# Altium PCB 小智-V1.1.PCBDOC
Units mil, origin at the board's own origin, x right, y up, seen from the top; angles counter-clockwise.
Board outline 1964.55 x 1299.13 mil, 2 copper layers (Top Layer, Bottom Layer); 107 components, 65 nets, 340 pads, 228 vias.
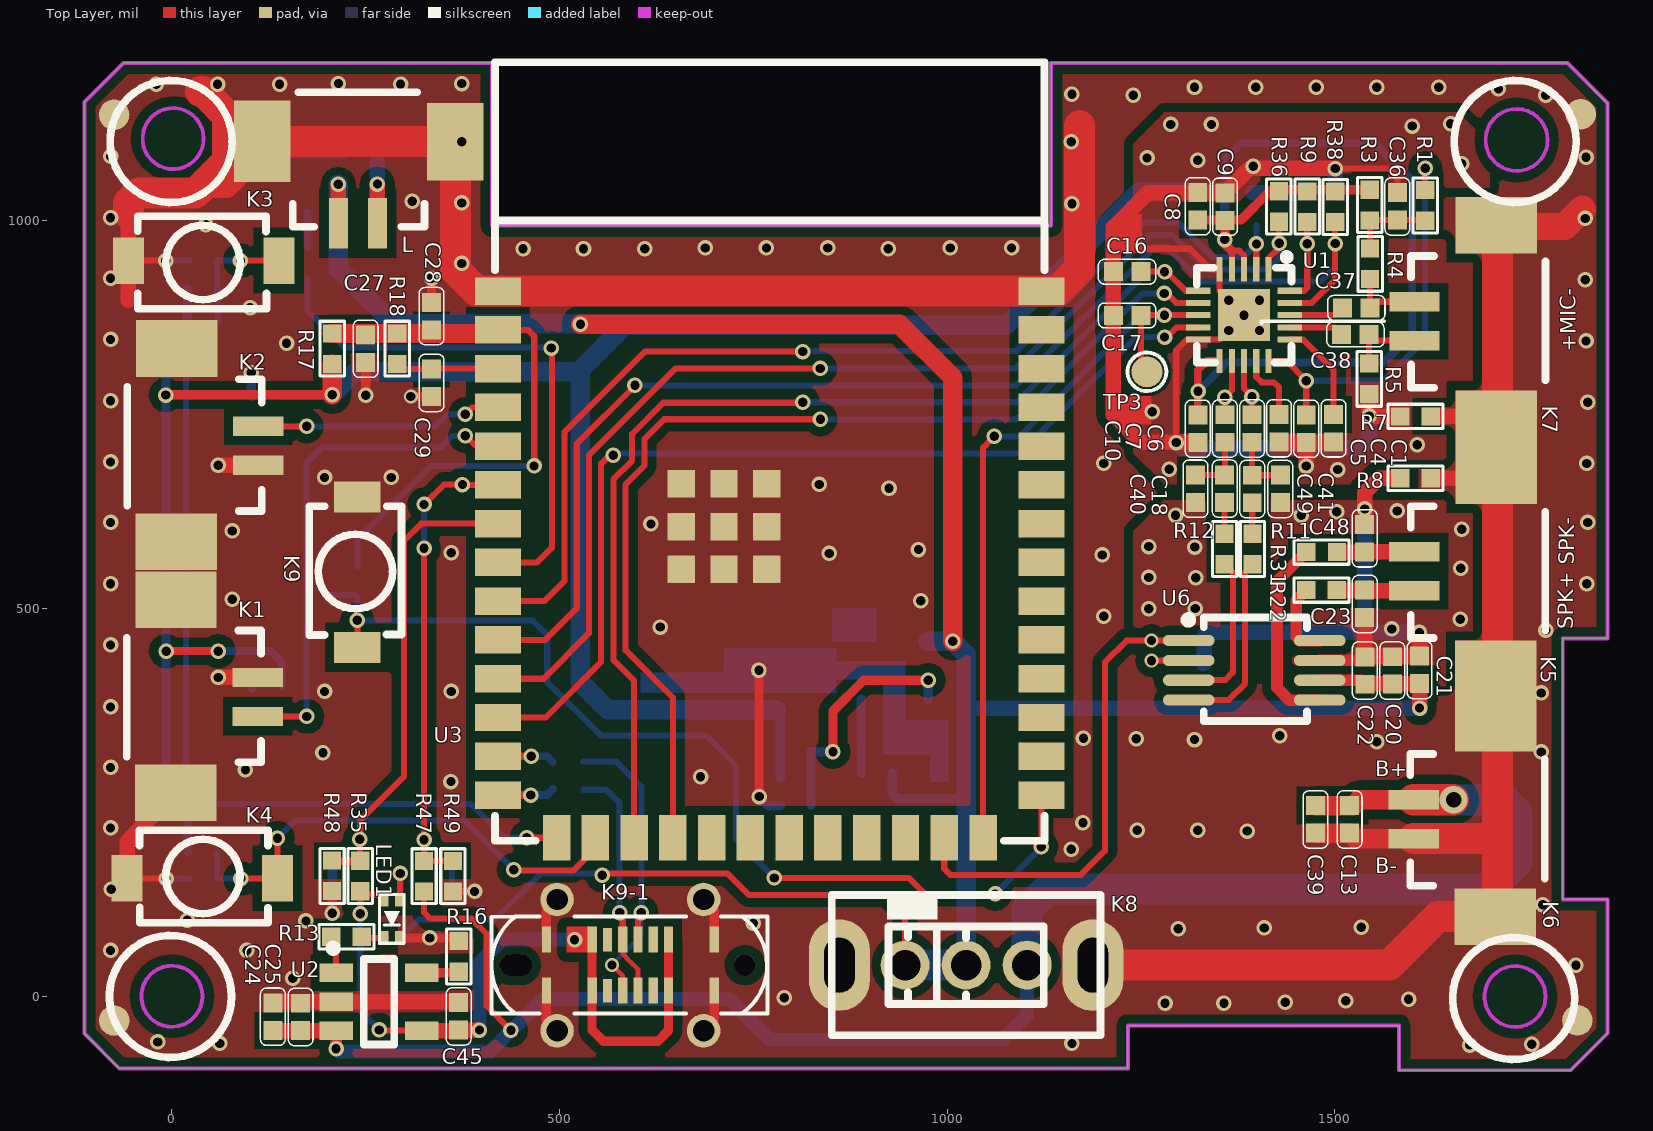
[diagram p0: Top Layer view]
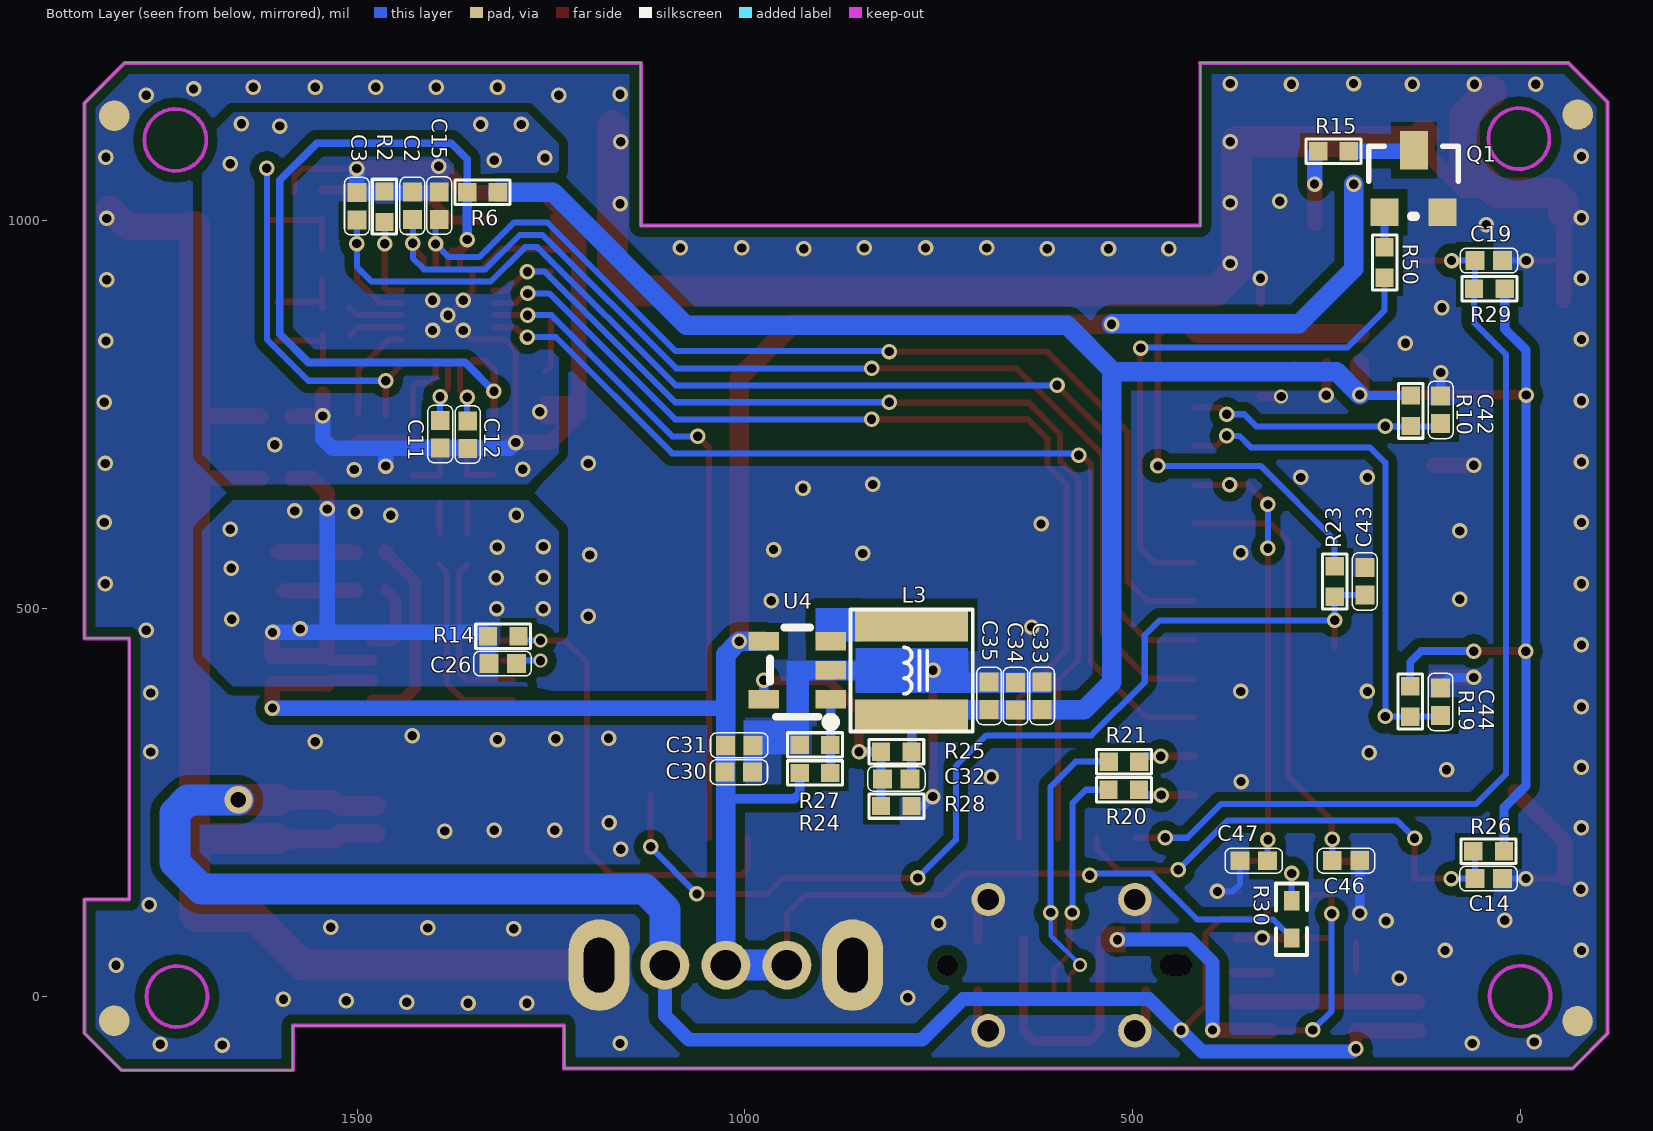
[diagram p1: Bottom Layer view, seen from below]

## Layer stack, top to bottom
Top Layer: signal copper 1.4
Dielectric: dielectric 12.6, FR-4, Dk 4.8
Bottom Layer: signal copper 1.4

## Board outline
-67.69,-93.28 -112.73,-48.24 -112.73,1153.01 -62.11,1203.63 412.65,1203.63 412.65,993.77 1134.03,993.77 1134.03,1203.63 1799.88,1203.63 1851.82,1151.68 1851.82,461.4 1793.9,461.4 1793.9,124.74 1851.81,124.74 1851.81,-47.75 1804.05,-95.51 1582.9,-95.51 1582.9,-37.9 1233.04,-37.9 1233.04,-93.28

## Design rules (kind name [scope] priority, off if disabled: settings)
Clearance Clearance_1 [InPolygon] p1: gap=12
Clearance [All] p2: gap=7.87
ComponentClearance [All] p1: gap=0 collisioncheckmode=3 verticalgap=0 showdistances=FALSE
HoleToHoleClearance [All] p1: gap=0 allowstackedmicrovias=TRUE
MinimumSolderMaskSliver [All] p1: minsoldermaskwidth=0
PlaneConnect [All] p1: planeconnectstyle=Direct reliefexpansion=20 reliefentries=4 reliefconductorwidth=10 reliefairgap=10
PolygonConnect [All] p1: connectstyle=Direct reliefconductorwidth=10 reliefentries=4 polygonreliefangle="90 Angle"
RoutingVias [All] p1: holewidth=12 width=20 viastyle="Through Hole" minholewidth=12 minwidth=18 maxholewidth=20 maxwidth=36
SilkToSilkClearance [All] p1: silktosilkclearance=0
SilkscreenOverComponentPads [All] p1: minsilkscreentomaskgap=0
SolderMaskExpansion [All] p1: expansion=4
Width [All] p1: maxlimit=100 minlimit=6 preferedwidth=7.87 minimp=50.000000 maximp=50.000000 favimp=50.000000
22 further rules are at their usual default settings.

## Classes and differential pairs
component class "Audio Codec": C1 C2 C3 C4 C5 C6 C7 C8 C9 C10 C11 C12 C15 C16 C17 C18 C20 C21 C22 C23 C26 C36 C37 C38 C40 C41 C48 C49 C? K5 K7 R1 R2 R3 R4 R5 R6 R7 R8 R9 R11 R12 R14 R22 R31 R36 R38 R? TP3 U1 U6
component class ESP32-S3: C13 C14 C19 C24 C25 C27 C28 C29 C30 C31 C32 C33 C34 C35 C39 C40 C41 C43 C45 C46 C47 D1 D2 FB1 FB2 K1 K2 K3 K4 K6 K8 K9 K9-1 K10 L L1 L2 L3 LED1 P1 P4 P5 P6 Q1 R10 R13 R15 R16 R17 R18 R19 R20 R21 R23 R24 R25 R26 R27 R28 R29 R30 R35 R47 R48 R49 R50 TP4 TP5 U2 U3 U4 U5 U7 U8

## Components (designator, comment, footprint, x,y, rotation, side; value= is the part's Value field where it differs from the comment)
C1 "1uF/16V" C0402 1498.28,732.34 r270 top
C2 "22pF/50V" C0402 1428.81,1019.34 r270 bottom
C3 "22pF/50V" C0402 1500.35,1018.86 r270 bottom
C4 "1uF/16V" C0402 1463.16,731.79 r270 top
C5 "1uF/16V" C0402 1428.04,732.34 r270 top
C6 "1uF/16V" C0402 1393.3,732.09 r90 top
C7 "1uF/16V" C0402 1358.13,732.09 r90 top
C8 "100nF/50V" C0402 1323.17,1018.73 r270 top
C9 "100nF/50V" C0402 1358.35,1018.19 r270 top
C10 "1uF/16V" C0402 1323.24,731.81 r90 top
C11 "22pF/50V" C0402 1392.81,724.95 r90 bottom
C12 "22pF/50V" C0402 1357.4,724.27 r90 bottom
C13 "22uF/6.3V" C0402 1519,228 r90 top
C14 "100nF/50V" C0402 40.84,151.7 r180 bottom
C15 "22pF/50V(NC)" C0402 1394.13,1019.62 r270 bottom
C16 "22pF/50V(NC)" C0402 1232.01,934.38 r0 top
C17 "22pF/50V(NC)" C0402 1232.1,877.91 r0 top
C18 "100nF/50V" C0402 1357.89,654.54 r90 top
C19 "100nF/50V" C0402 40.46,948.73 r180 bottom
C20 "22uF/16V" C0402 1574.1,420.07 r270 top
C21 "22uF/16V" C0402 1609.21,420.79 r270 top
C22 "1uF/16V" C0402 1538.64,419.96 r270 top
C23 "1nF/50V" C0402 1538.46,505.91 r270 top
C24 "10uF/16V" C0402 130.36,-26.47 r270 top
C25 "100nF/50V" C0402 166.16,-26.83 r270 top
C26 "1uF/16V" C0402 1312.46,428.99 r0 bottom
C27 "22uF/6.3V" C0402 250,835 r90 top
C28 "100nF/16V" C0402 335,877 r270 top
C29 "1uF/16V" C0402 335,791 r90 top
C30 "10uF/16V" C0402 1007.76,288.9 r0 bottom
C31 "100nF/50V" C0402 1007.3,323.45 r0 bottom
C32 "22pF/50V" C0402 804.6,280.22 r180 bottom
C33 "100nF/50V" C0402 616.62,387.32 r270 bottom
C34 "10uF/16V" C0402 650.9,386.93 r270 bottom
C35 "10uF/16V" C0402 685.05,387.33 r270 bottom
C36 "1uF/16V" C0402 1580.62,1018.52 r90 top
C37 "1uF/16V" C0402 1527.68,887.71 r0 top
C38 "1uF/16V" C0402 1526.46,853.28 r0 top
C39 "100nF/50V" C0402 1475,228 r90 top
C40 "22pF/50V" C0402 1320.26,654.46 r90 top
C41 "22pF/50V" C0402 1429.73,654.27 r90 top
C42 "100nF/50V" C0402 102.6,756.15 r90 bottom
C43 "100nF/50V" C0402 200.44,534.93 r90 bottom
C44 "100nF/50V" C0402 102.79,379.57 r90 bottom
C45 "1uF/16V" C0402 369.97,-26.06 r90 top
C46 "100nF/50V" C0402 224.7,174.71 r180 bottom
C47 "100nF/50V" C0402 343.67,174.67 r0 bottom
C48 "1nF/50V" C0402 1538.41,590.47 r90 top
C49 "100nF/50V" C0402 1393.44,654.1 r90 top
K1 "Touch1" HC-1.25-2PWT#1 110.78,360.74 r90 top locked
K2 "Touch2" HC-1.25-2PWT#1 111.5,684.56 r90 top locked
K3 "SW-PB" K(3*4*2.5H) -55.86,948.73 r0 top locked
K4 "SW-PB" K(3*4*2.5H) 136.3,151.88 r180 top locked
K5 "SPK" HC-1.25-2PWT#1 1602.39,572.99 r270 top locked
K6 "BAT" HC-1.25-2PWT#1 1601.76,253.32 r270 top locked
K7 "MIC" HC-1.25-2PWT#1 1602.7,895.64 r270 top locked
K8 "Header 3X2" "SS12D07VG4 087" 1024.46,40.01 r0 top locked
K9 "SW-PB" K(3*4*2.5H) 239.33,643.84 r270 top
K9-1 "GT-USB-7055E" GT-USB-7055E 591.43,40.01 r180 top locked
L "" HC-1.25-2PWT#2 215,996.79 r0 top locked
L3 "2.2uH/3A" SWPA4020 784.81,419.96 r270 bottom
LED1 "RG_LED(D0603)" LED-SMD_4P-L1.6 283.76,99.72 r90 top
Q1 "MMBTA06" SOT-23 137.65,1051.02 r180 bottom
R1 "220R/(1%)" R0402#1 1616.51,1019.92 r270 top
R2 "10K/(1%)" R0402#1 1464.79,1018.11 r90 bottom
R3 "220R/(1%)" R0402#1 1545.2,1020.15 r270 top
R4 "2K/(1%)" R0402#1 1545.45,944.56 r270 top
R5 "2K/(1%)" R0402#1 1544.32,796.21 r270 top
R6 "0R/(1%)" R0402#1 1338.26,1036.98 r180 bottom
R7 "0R/(1%)" R0402#1 1603.85,747.66 r0 top
R8 "0R/(1%)" R0402#1 1603.91,667.8 r0 top
R9 "10K/(1%)" R0402#1 1464.22,1018.18 r90 top
R10 "1K/(1%)" R0402#1 141,755 r270 bottom
R11 "100K/(1%)" R0402#1 1393.72,576.6 r90 top
R12 "100K/(1%)" R0402#1 1357.77,576.6 r90 top
R13 "330R/(1%)" R0402#1 225.47,76.57 r180 top
R14 "10K/(1%)" R0402#1 1311.63,464.32 r0 bottom
R15 "330R/(1%)" R0402#1 240.86,1089.73 r0 bottom
R16 "2.4K 1%" R0402#1 369.97,51.36 r270 top
R17 "0R/(1%)" R0402#1 207,835 r90 top
R18 "1K/(1%)" R0402#1 291,835 r270 top
R19 "1K/(1%)" R0402#1 142,380 r270 bottom
R20 "22R(1%)" R0402#1 511.26,266.17 r0 bottom
R21 "22R(1%)" R0402#1 510.97,302.52 r0 bottom
R22 "0R/(1%)" R0402#1 1482.62,523.77 r0 top
R23 "47K/(1%)" R0402#1 239.33,534.67 r270 bottom
R24 "100K/(1%)" R0402#1 909.58,287.89 r180 bottom
R25 "680K/(1%)" R0402#1 804.68,315.39 r0 bottom
R26 "47K/(1%)" R0402#1 40.72,186.79 r0 bottom
R27 "100K/(1%)" R0402#1 909.34,324 r0 bottom
R28 "150K/(1%)" R0402#1 804.65,245.19 r180 bottom
R29 "47K/(1%)" R0402#1 39.84,912.29 r0 bottom
R30 "1K(1%)" R0402#2 294.82,99.13 r270 bottom
R31 "0R/(1%)" R0402#1 1482.99,572.77 r0 top
R35 "100K" R0402#1 242.89,154.83 r270 top
R36 "100K/(1%)" R0402#1 1427.88,1018.47 r270 top
R38 "100K/(1%)" R0402#1 1500.38,1018.03 r270 top
R47 "301K" R0402#1 325.32,154.71 r270 top
R48 "100K" R0402#1 206.68,155.21 r90 top
R49 "100K" R0402#1 362.66,154.71 r90 top
R50 "1K/(1%)" R0402#1 174.94,946.02 r90 bottom
TP3 "TP" TEST_SMD 1257.66,805.23 r0 top
U1 "ES8311" WQFN-20-EP(3x3)_ES8311 1414.41,937.31 r180 top
U2 "TP4054" SOT-23-5 267.14,-7.09 r180 top
U3 "ESP32-S3-WROOM-1" ESP32-S3-WROOM-1 771.27,556.86 r0 top locked
U4 "ETA3409S2F" SOT23-5_ETA3409S2F 889.1,383.03 r90 bottom
U6 "NS4150B" MSOP-8_L3.0-W3.0 1396.1,420.23 r270 top locked

## Footprints (in the part's own frame and the unit in brackets; to place one, negate y for a bottom-side part, rotate by r counter-clockwise, add the part's x,y. Pads: shape width x height; smd on the part's side, far side on the other; paste and mask are expansions set on the pad)
C0402 [mm]
  rect 0.62x0.62 smd: 1(-0.45,0) 2(0.45,0)
  silkscreen extent -0.94,-0.41 0.94,0.41
ESP32-S3-WROOM-1 [mm]
  rect 1.5x0.9 smd: 1(-8.9,8.955) 2(-8.9,7.685) 3(-8.9,6.415) 4(-8.9,5.145) 5(-8.9,3.875) 6(-8.9,2.605) 7(-8.9,1.335) 8(-8.9,0.065) 9(-8.9,-1.205) 10(-8.9,-2.475) 11(-8.9,-3.745) 12(-8.9,-5.015) 13(-8.9,-6.285) 14(-8.9,-7.555) 27(8.9,-7.555) 28(8.9,-6.285) 29(8.9,-5.015) 30(8.9,-3.745) 31(8.9,-2.475) 32(8.9,-1.205) 33(8.9,0.065) 34(8.9,1.335) 35(8.9,2.605) 36(8.9,3.875) 37(8.9,5.145) 38(8.9,6.415) 39(8.9,7.685) 40(8.9,8.955)
  rect 0.9x1.5 smd: 15(-6.985,-8.954) 16(-5.715,-8.954) 17(-4.445,-8.954) 18(-3.175,-8.954) 19(-1.905,-8.954) 20(-0.635,-8.954) 21(0.635,-8.954) 22(1.905,-8.954) 23(3.175,-8.954) 24(4.445,-8.954) 25(5.715,-8.954) 26(6.985,-8.954)
  rect 0.9x0.9 smd: 41(-2.9,-0.165) 41(-2.9,1.235) 41(-2.9,2.635) 41(-1.5,-0.165) 41(-1.5,1.235) 41(-1.5,2.635) 41(-0.1,-0.165) 41(-0.1,1.235) 41(-0.1,2.635)
  silkscreen extent -9,-9.05 9,16.45
GT-USB-7055E [mm]
  round 1.1 hole 0.7: 0(-2.4,2.15) 0(-2.4,-2.15) 0(2.4,2.15) 0(2.4,-2.15)
  rect 0.3x0.85 smd: A1(-2.75,0.835) A4(-1.25,0.835) A5(-0.75,0.835) A6(-0.25,0.835) A7(0.25,0.835) A9(1.25,0.835) A12(2.75,0.835) B1(2.75,-0.835) B4(1.25,-0.835) B6(0.25,-0.835) B7(-0.25,-0.835) B8(-0.75,-0.835) B9(-1.25,-0.835) B12(-2.75,-0.835)
  rect 0.3x0.762 smd: A8(0.75,0.835) B5(0.75,-0.835)
  round 0.7 hole 0.7: NC(-3.75,0)
  oval 1.05x0.7 hole 0.7 slot 1.05 at 0 deg: NC(3.75,0)
  silkscreen extent -4.5,-1.59 4.55,1.59
HC-1.25-2PWT#1 [mil]
  rect 25x65 smd: 1(0,0) 2(50.28,0)
  rect 73x105 smd: 3(150.7,105.28) 4(-98.48,105.7)
  silkscreen extent -59,-4 111,169
HC-1.25-2PWT#2 [mil]
  rect 25x65 smd: 1(0,0) 2(50.28,0)
  rect 73x100 smd: 3(150.7,105.28)
  rect 73x105 smd: 4(-98.47,105.7)
  silkscreen extent -59,-4 111,169
K(3*4*2.5H) [mil]
  rect 40x60 smd: 1(0,0) 2(193.89,0)
  round 65 on Top Overlay: 3(95.84,-3.33)
  silkscreen extent 12,-62 178,57
LED-SMD_4P-L1.6 [mm]
  rect 0.45x0.35 smd: 1(-0.625,0.275) 3(0.625,0.275) 4(0.625,-0.275)
  rect 0.45x0.33 smd: 2(-0.625,-0.275)
  silkscreen extent -0.8,-0.4 0.8,0.4
MSOP-8_L3.0-W3.0 [mm]
  oval 0.364x1.692 smd: 1(-0.975,-2.146) 2(-0.325,-2.146) 3(0.325,-2.146) 4(0.975,-2.146) 5(0.975,2.146) 6(0.325,2.146) 7(-0.325,2.146) 8(-0.975,2.146)
  silkscreen extent -1.78,-2.29 1.66,1.73
R0402#1 [mm]
  rect 0.6x0.6 smd: 1(-0.5,0) 2(0.5,0)
  silkscreen extent -0.9,-0.4 0.9,0.4, body extent -0.55,-0.3 0.55,0.3, height 2.54
R0402#2 [mm]
  rect 0.635x0.508 smd: 1(-0.612,0) 2(0.612,0)
  silkscreen extent -1.17,-0.51 1.17,0.51, body extent -0.49,-0.25 0.51,0.25, height 0.35
SOT23-5_ETA3409S2F [mm]
  rect 0.6x1 smd: 1(0,0) 2(0.95,0) 3(1.9,0) 4(1.9,2.2) 5(0,2.2)
  silkscreen extent -0.9,-0.15 2.35,1.99
SOT-23 [mil]
  rect 36x36 smd: 1(-37.5,-40) 2(37.5,-40)
  rect 36x50 smd: 3(0.5,40)
  silkscreen extent -58,-45 58,45
SOT-23-5 [mm]
  rect 1.1x0.6 smd: 1(1.4,-0.95) 2(1.4,0) 3(1.4,0.95) 4(-1.4,0.95) 5(-1.4,-0.95)
  silkscreen extent -0.5,-1.87 1.62,1.4
"SS12D07VG4 087" [mm]
  round 1.6 hole 1: 1(-2,0) 2(0,0) 3(2,0)
  oval 2x3 hole 1 slot 1.8 at 90 deg: 4(4.15,0) 5(-4.15,0)
  silkscreen extent -4.4,-2.3 4.4,2.3
SWPA4020 [mm] "15uH1.5A  SWPA4020"
  rect 1.1x3.7 smd: 1(-1.5,0) 2(1.5,0)
  silkscreen extent -2,-2 2,2
TEST_SMD [mil]
  round 40 smd mask+1.65: 1(0,0)
  silkscreen extent -25,-25 25,25
WQFN-20-EP(3x3)_ES8311 [mm]
  rect 0.2x0.8 smd: 1(0,0) 2(0.4,0) 3(0.8,0) 4(1.2,0) 5(1.6,0) 11(1.6,3) 12(1.2,3) 13(0.8,3) 14(0.4,3) 15(0,3)
  rect 0.8x0.2 smd: 6(2.3,0.7) 7(2.3,1.1) 8(2.3,1.5) 9(2.3,1.9) 10(2.3,2.3) 16(-0.7,2.3) 17(-0.7,1.9) 18(-0.7,1.5) 19(-0.7,1.1) 20(-0.7,0.7)
  rect 1.7x1.7 smd: 21(0.8,1.5)
  silkscreen extent -0.75,-0.5 2.35,3.05

## Part data
C1 C2 C3 C4 C5 C6 C7 C8 C9 C10 C11 C12 C14 C15 C16 C17 C18 C19 C20 C21 C22 C23 C26 C27 C28 C29 C30 C31 C32 C33 C34 C35 C36 C37 C38 C40 C41 C42 C43 C44 C48 C49: library part Cap, "Capacitor"
C13 C24: library part "0603 10uF (106) 10% 10V", "贴片电容"
C25 C39: library part "0402 100nF (104) 10% 16V", "贴片电容"
C45: library part "0603 470nF (474) 10% 25V", "贴片电容"
C46 C47: library part "0603 1.0pF (010) 0.25pF 50V", "贴片电容"
K1 K2 K5 K6 K7 L: library part "Header 2X2", "Header, 2-Pin, Dual row"
K8: "Header, 3-Pin, Dual row"
L3: library part Inductor, "Inductor"
LED1: library part RG_LED
Q1: library part 2N3904, "NPN General Purpose Amplifier"
R1 R2 R3 R4 R5 R6 R7 R8 R9 R10 R11 R12 R14 R15 R17 R18 R19 R20 R21 R22 R23 R24 R25 R26 R27 R28 R29 R31 R36 R38 R50: library part Res1, "Resistor"
R13 R30: library part "0402 1KΩ (1001) 1%", "贴片电阻"
R16: library part "0402 2.4KΩ (2401) 1%", "贴片电阻"
R35 R47 R48 R49: library part "0402 100KΩ (1003) 1%", "贴片电阻"
U2: "电池电源管理"
U6: library part NS4150

## Free pads (board coordinates)
  round 39.37 smd: 0(-74.39,1136.64) 0(-74.14,-31.39) 0(1812.9,-31.18) 0(1816.99,1137.5)
  round 39.37 smd far side: 0(-74.07,1137.01) 0(-73.92,-32.14) 0(1813.2,-31.69) 0(1813.2,1135.34)

## Via types
v1: diameter 20, hole 12, Top Layer to Bottom Layer, 223 vias
v2: diameter 18, hole 12, Top Layer to Bottom Layer, 4 vias
v3: diameter 36, hole 20, Top Layer to Bottom Layer, 1 vias

## Nets (pads, with @x,y where several pads share a name; then routed paths per layer and width w, separated by ;. In a path a pad name is that pad's centre, name@x,y a point inside that pad or via, vN(x,y) a via of type N, cw(c..) or ccw(c..) an arc to the next point about the centre after c; other vN are vias at no path point)
ADCVREF: C4.1 R1.1 U1.15 | length 527.6
  Top Layer w7.87: U1.15 1437.7,819.19 v1(1463.16,793.73) C4.1 ; R1.1 v1(1616.51,1067.69)
  Bottom Layer w7.87: v1(1463.16,793.73) 1563.01,793.73 1616.51,847.23 v1(1616.51,1067.69)
AU_3V3: C8.2 C9.2 C10.2 R3.1 R6.1 R9.2 R36.1 R38.1 U1.3 U1.4 U1.11 | length 1309.2
  Top Layer w7.87: U1.4 1367.17,961.34 1376.8,961.34 1382.91,955.23 U1.3
  Top Layer w10: C10.2 1323.24,807.02 1335.41,819.19 U1.11@1350.32,819.19
  Top Layer w12: C8.2 1378.91,1001.01 1416.05,1038.15 R36.1 1429.56,1039.83 R3.1 ; C9.2 1358.35,970.16 1367.17,961.34
  Bottom Layer w10: v1(1323.6,780.04) 1360.77,817.21 1562.72,817.21 1599.7,854.19 1599.7,1052.15 1551.81,1100.04 1378.56,1100.04 1357.94,1079.42 R6.1
  Bottom Layer w12: v1(1358.12,975.74) R6.1@1358.12,1036.81
AU_GND: C1.2 C2.1 C3.1 C4.2 C5.2 C8.1 C9.1 C10.1 C11.1 C12.1 C15.1 C16.1 C17.1 C36.2 R2.2 R5.2 R7.1 U1.5 U1.10 U1.21 | length 1845.7
  Top Layer w7.87: 1214.39,963.88 1313.19,963.88 1339.76,937.31 U1.5 1351.42,909.75 U1.21 1351.42,846.75 U1.10 1309.29,846.75 1295.49,832.95 v1@1295.49,714.09 ; v1(1500.35,1067.4) 1570.83,1067.4 1580.62,1057.61 C36.2
  Top Layer w20: C10.1 1295.49,714.09 1250.31,714.09 1214.39,750.01 C17.1 1214.39,963.88 1214.39,991.39 1259.41,1036.41 C9.1@1358.35,1036.41 ; C9.1 1390.28,1067.84 1499.91,1067.84 v1(1500.35,1067.4) ; C5.2 C1.2 ; v1(1463.16,683.69) C4.2 ; v1(1544.32,748.29) R5.2 ; v1@1544.95,747.66 R7.1
  Bottom Layer w20: v1(1295.49,714) 1302.94,706.55 C12.1 C11.1@1392.13,706.55 ; C11.1 C11.1@1392.13,706.55 ; C15.1@1394.13,1036.32 C3.1@1500.09,1036.32 ; v1(1463.16,683.69) 1463.16,703.24 ; C3.1 v1(1500.35,1067.4) ; v1(1544.32,748.29) 1544.32,719 1531.87,706.55 C11.1@1392.13,706.55
  other v1: 1503.71,679.13 1286.47,679.68 1606.1,711.15 1264.68,753.88 1363.17,858.56 1402.71,858.56 1382.94,878.33 1363.02,897.65 1402.71,897.65 1394.83,1070.36 1663.68,1073.73 1323.36,1078.26 1257.78,1081.03 1599.87,1122.18 1288.26,1124.21 1340.9,1124.21 1649.28,1125.06
BAT_MEAS_ADC: C47.1 R47.1 R49.2 U3.6 | length 630.6
  Top Layer w7.87: v1@325.23,577.52 325.32,451.17 ; 325.32,452.14 325.32,451.17 ; v1(325.39,634.15) 351.12,659.88 v1(374.88,659.88) 375.99,659.4 U3.6 ; R49.2 R47.1 v1(325.32,201.62) 325.32,451.17
  Bottom Layer w7.87: v1(325.39,577.52) v1(325.39,634.15) ; C47.1 v1@325.95,200.93
CODEC_I2S0_ASDOUT: U1.7 U3.18 | length 1382.6
  Top Layer w7.87: U3.18 646.27,385.19 585.28,446.18 585.28,660.04 609.44,684.2 609.44,718.51 635.04,744.11 v1(836.58,744.11) ; v1(1280.16,906.33) 1282.96,906.33 1295.29,894 U1.7
  Bottom Layer w7.87: v1(836.58,744.11) 840.15,747.68 844.02,743.81 1089.76,743.81 1116.95,770.99 ; 1093.86,747.91 1116.95,770.99 ; v1(1280.16,906.33) 1252.28,906.33 1116.95,770.99
CODEC_I2S0_DSDIN: U1.9 U3.12 | length 1287.7
  Top Layer w7.87: U3.12 482.05,359.4 553.78,431.13 553.78,686.61 v1@562.21,695.04 ; v1@567.1,699.93 v1(569.3,697.73) ; v1@1280.38,847.02 v1@1283.46,850.1 ; v1(1280.38,850.1) v1@1283.46,850.1 ; U1.9 1295.86,862.5 v1@1283.46,850.1
  Bottom Layer w7.87: v1(569.3,697.73) 567.09,699.94 883.89,699.94 ; 860.89,699.94 883.89,699.94 ; v1(1280.38,850.1) 1243.84,850.1 1093.68,699.94 883.89,699.94
CODEC_I2S0_LRCK: C17.2 TP3.1 U1.8 U3.26 | length 1002.3
  Top Layer w7.87: U3.26 1046.27,526.08 ; 1046.27,532.06 1046.27,526.08 ; 1046.27,693.05 1046.27,668.41 ; v1@1057.36,717.25 v1@1057.36,718.67 ; C17.2 1249.82,813.07 TP3.1 ; C17.2@1250.16,878.25 v1(1280.19,878.25) U1.8 ; 1046.27,526.08 1046.27,668.41 ; 1046.27,668.41 1046.27,707.58 v1@1057.36,718.67 ; v1@1057.36,718.67 1057.36,721.99 v1(1060.68,721.99) v1@1057.36,718.67
  Bottom Layer w7.87: v1(1060.68,721.99) 1093.46,721.99 1101.08,729.61 ; 1096.78,725.31 1101.08,729.61 ; v1(1280.19,878.25) 1249.72,878.25 1101.08,729.61
CODEC_I2S0_MCLK: C15.2 U1.2 U3.9 | length 1373.7
  Top Layer w7.87: U3.9 480.35,509.4 506.54,535.59 506.54,727.73 610.36,831.55 v1@812.12,831.55 ; U1.2 v1@1398.66,970.09
  Bottom Layer w7.87: v1(813.7,831.37) 814.34,832.01 1088.88,832.01 1254.5,997.63 1297.95,997.63 1342.17,953.41 1382.22,953.41 v1(1398.9,970.09) C15.2@1398.9,994.48
CODEC_I2S0_SCLK: C16.2 U1.6 U3.17 | length 1404.8
  Top Layer w7.87: U3.17 596.27,407.02 569.53,433.76 569.53,666.56 593.69,690.73 593.69,725.03 633.98,765.32 810.56,765.32 813.57,768.33 813.78,768.12 v1(813.78,765.93) ; C16.2@1249.8,934.45 v1(1280.38,934.45) 1282.89,934.45 1307.59,909.75 U1.6
  Bottom Layer w7.87: v1@813.78,767.89 v1(813.78,765.93) 1089.61,765.93 1258.13,934.45 v1(1280.38,934.45)
DAC_AOUTLN: C6.1 C41.2 C49.2 | length 77.4
  Top Layer w7.87: C49.2@1393.3,671.96 C6.1 ; C49.2 C41.2@1428.39,671.82
DAC_AOUTLP: C7.1 C18.2 C40.2 | length 75.2
  Top Layer w7.87: C40.2@1324.57,672.26 C18.2 ; C18.2@1358.13,672.5 C7.1
DACVREF: C5.1 U1.14 | length 90.6
  Top Layer w7.87: U1.14 1398.66,798.55 1405.58,791.64 1421.52,791.64 1428.04,785.12 C5.1
ES_I2C_CLK: C2.2 R36.2 U1.1 U3.11 | length 1517.6
  Top Layer w7.87: U3.11 479.56,409.4 538.04,467.88 538.04,697.51 650.09,809.56 v1(836.21,809.56) ; U1.1 1414.41,951.22 1428.12,964.93 v1(1428.12,970.98) R36.2@1428.12,998.11
  Bottom Layer w7.87: v1(836.21,809.56) 1088.7,809.56 1261.02,981.88 1290,981.88 1334.54,937.34 1413.58,937.34 1428.12,951.88 v1(1428.12,970.98) C2.2@1428.12,999.66
ES_I2C_SDA: C3.2 R38.2 U1.19 U3.10 | length 1645.7
  Top Layer w7.87: U3.10 481.55,459.4 522.29,500.14 522.29,712.27 v1@597.58,787.56 ; U1.19 1470.51,894 1500.38,923.87 v1(1500.38,970.58) R38.2
  Bottom Layer w7.87: v1(597.4,787.75) 1089.16,787.75 1267.54,966.13 1283.48,966.13 1328.02,921.59 1481.12,921.59 1500.38,940.85 v1(1500.38,970.58) C3.2
ESP0_BOOT_EN: C29.2 R18.2 U3.3 | length 132.6
  Top Layer w7.87: R18.2 297.6,808.72 C29.2 ; C29.2@335,809.4 U3.3
ESP0_BOOT_IO0: C43.1 K9.2 R23.2 U3.27 | length 1317.4
  Top Layer w7.87: K9.2 v1(239.33,484.67) ; v1(777.11,152.48) 950.2,152.48 970.81,131.87 v1(1061.74,131.87) ; v1(1121.43,192.82) 1121.43,259.16 U3.27
  Bottom Layer w7.87: C43.1 237.1,517.21 R23.2 v1(239.33,484.67) 465.12,484.67 484.32,465.47 484.32,404.98 553.08,336.22 688.55,336.22 727.9,296.87 727.9,201.69 v1(777.11,152.48) ; v1@1061.27,131.62 1121.43,191.78 v1(1121.43,192.82)
ESP0_BOOT_IO2: U3.38
ESP0_VDD33: C27.2 C28.2 R17.2 R18.1 R23.1 U3.2 | length 734.5
  Top Layer w7.87: U3.2 459.22,859.4 467.46,851.16 v1@467.46,683.87
  Top Layer w25: R17.2 416.17,854.69 U3.2
  Bottom Layer w7.87: R23.1 239.33,588.31 334.89,683.87 v1(467.2,683.87)
ESP_RXD: U3.36
ESP_TXD: U3.37
ESP_USB_DM: R21.1 U3.13 | length 73.4
  Top Layer w10: U3.13 v1(463.43,309.4)
  Bottom Layer w10: v1(463.43,309.4) 484.09,309.4 R21.1@491.29,302.2
ESP_USB_DP: R20.1 U3.14 | length 73.9
  Top Layer w10: U3.14 v1(463.15,259.4)
  Bottom Layer w10: v1(463.15,259.4) 483.92,259.4 R20.1@491.57,267.05
GND: C13.1 C14.2 C19.2 C24.1 C25.1 C27.1 C28.1 C29.1 C30.1 C31.1 C33.1 C34.1 C35.1 C39.1 C42.2 C43.2 C44.2 C45.2 C46.2 C47.2 K1.2 K1.3 K1.4 K2.1 K2.3 K2.4 K3.1 K4.2 K5.3 K5.4 K6.2 K6.3 K6.4 K7.3 K7.4 K8.4 K8.5 K9-1.0 K9-1.A1 K9-1.A12 K9-1.B1 K9-1.B12 K9.1 L.3 L.4 LED1.2 pad.0 Q1.2 R7.2 R8.2 R16.1 R27.2 R28.2 R48.1 R49.1 U2.2 U3.1 U3.40 U3.41 U4.2 | length 5751.1
  Top Layer w7.87: K4.2@-57.42,151.7 v1(-7.37,151.7) ; K3.1 v1(-7.67,948.73) ; R49.1 v1(390.53,135.03)
  Top Layer w12: R48.1 206.99,135.22 v1(206.99,106.9) ; v1(250,775) C27.1 ; LED1.2 v1(332.53,75.11) R16.1@365.9,75.11 ; v2(308.28,773.28) C29.1 ; C28.1 v1(335,926) ; 378.43,909.4 U3.1@392.83,909.4 ; K9-1.A12 483.16,-30.86 K9-1.0@496.94,-44.64 ; K9-1.B1 483.16,110.88 K9-1.0@496.94,124.66 ; K9-1.0@685.91,-44.64 699.69,-30.86 K9-1.A1 ; K9-1.0@685.91,124.66 699.69,110.88 K9-1.B12 ; v1@757.3,257.48 v1(757.3,420.23)
  Top Layer w20: K4.2 -57.59,199.59 K1.4 K1.4@6.22,263.4 ; -55.86,897.34 K3.1 -55.86,1010.07 -30.3,1035.63 -26.37,1039.56 34.8,1039.56 73.08,1039.56 120.4,1086.88 120.4,1102.49 132.33,1102.49 369.15,1102.49 L.3@369.57,1102.07 ; v1(59.85,684.56) K2.1 ; v1(59.86,411.02) K1.2 ; C24.1@132.02,-7.09 U2.2 C45.2@366.1,-7.09 ; R7.2 K7.3@1707.19,747.66 ; R8.2 K5.4@1709.91,667.8 ; K6.3 K6.3@1709.91,105.49 ; K7.4 K7.4@1709.91,992.6
  Top Layer w25: C39.1 C13.1 1526.24,203.04 K6.2
  Top Layer w35: K7.4@1709.91,992.6 1796.7,992.6 1819.05,1014.95
  Top Layer w40: -55.86,1010.07 -55.86,1022.63 -42.86,1035.63 -30.3,1035.63 30.87,1035.63 34.8,1039.56 72.08,1076.84 72.08,1135.12 42.6,1164.6 ; 36.91,1166.9 40.3,1166.9 ; L.4@124.43,1110.39 132.33,1102.49 132.75,1102.07 L.3 365.7,936.53 392.83,909.4 U3.1 U3.40 1142.05,909.4 1170.71,938.06 1170.71,1122.66 ; K8.4 1570.59,40.01 1633.2,102.62 K6.3 ; K6.2 1708.51,203.04 ; K6.3@1709.91,105.49 1709.91,667.8 K7.4@1709.91,992.6
  Bottom Layer w7.87: v1(-7.67,948.73) C19.2 ; v1(-7.37,151.7) C14.2 ; C47.2 361.39,144.45 370.82,135.03 v1(390.53,135.03)
  Bottom Layer w12: v1(59.86,411.02) 90.7,411.02 C44.2@104,397.72 ; C42.2 v1(102.6,804.33) ; v1(206.99,106.9) C46.2 ; v1(757.59,257.48) 769.88,245.19 R28.2
  other v1: 1674,-63 1754,-62 62,-61 1161,-61 -18,-59 1281,-9 1357,-9 1436,-8 1514,-6 1595,-4 790,-2 156,23 1811,40 -79,59 97,59 1298,87 1409,88 1534,89 750,94 173,97 20,98 1768,118 -78,138 1159.96,189.52 1387,213 1245,214 1323,214 -79,217 1175.13,223.65 360.09,276.74 682,283 95,292 -79,295 195,314 1766,315 1554,328 1319,331 1244,332 1175.76,332.68 1429,336 -79,373 1766,391 197,393 360.4,393.04 -79,453 1772,472 630,476 1202,490 966,510 78,512 -79,532 1825,532 1200,569 848,571 360.4,571.91 963,576 78,600 618,609 -79,611 1826,611 925,655 835,660 197,669 283,669 1202,687 1825,687 -79,689 1826,766 -79,768 148,842 1824,845 -79,847 101,888 1823,924 -79,926 374,945 453,964 531,964 610,964 924,964 688,965 767,965 846,965 1004,965 1083,965 44,995 1823,1003 -79,1004 1161,1022 374,1023 310,1025 1824,1082 -79,1083 374,1102 1160,1102 1240,1162 1772,1162 1161,1163 1711,1170 1319,1172.18 1398,1172.18 1476,1172.18 1554,1172.18 1634,1172.18 -20,1176 59,1176 139,1176 295,1176 215,1177 374,1177
K3: R50.1 U3.8 | length 710.2
  Top Layer w7.87: U3.8 471.28,559.4 490.26,578.38 490.26,834.93 v1(489.27,835.92)
  Bottom Layer w7.87: R50.1 174.94,884.55 222.7,836.79 v1@488.4,836.79
KEY1: C19.1 K3.2 R29.2 U3.15 | length 1280.7
  Top Layer w7.87: v1(88.64,948.73) 137.29,948.73 K3.2 ; v1(457.87,204.32) U3.15
  Top Layer w10: K3.2@137.29,948.73 K3.2@137.29,949.12
  Bottom Layer w7.87: R29.2@58.18,908.36 C19.1 v1(88.64,948.73) ; R29.2 59.53,868.62 18.3,827.39 18.3,286.86 57.45,247.71 386.07,247.71 429.46,204.32 v1(457.87,204.32) v1@454.04,200.49
KEY2: C14.1 K4.1 R26.2 U3.16 | length 634.3
  Top Layer w7.87: v1(88.93,151.7) 89.11,151.88 K4.1 v1(136.3,203.7) ; v1@441.19,162.29 518.19,162.29 546.27,190.37 U3.16
  Bottom Layer w7.87: R26.2@58.56,184.94 C14.1 v1(88.93,151.7) ; v1(136.3,203.7) 159.25,226.65 377.46,226.65 v1(441.19,162.92)
NetC1_1: C1.1 U1.16 | length 130.2
  Top Layer w7.87: U1.16 1459.37,846.75 1498.28,807.84 C1.1
NetC6_2: C6.2 C11.2 U1.13 | length 97.5
  Top Layer w7.87: U1.13 1382.91,783.62 1393.3,773.23 C6.2
  Bottom Layer w7.87: C11.2@1393.26,749.33 v1@1393.26,773.1
  other v1: 1393.13,773.23
NetC7_2: C7.2 C12.2 U1.12 | length 96
  Top Layer w7.87: C7.2 1358.13,772.49 1367.17,781.53 U1.12
  Bottom Layer w7.87: C12.2@1358.16,749.67 v1(1358.16,772.49)
NetC18_1: C18.1 R12.2 | length 40.3
  Top Layer w7.87: R12.2@1357.89,596.57 C18.1
NetC23_1: C23.1 K5.2 R22.2 | length 100.1
  Top Layer w7.87: K5.2@1593.02,522.71 K5.2
  Top Layer w20: R22.2 1538.32,523.77 C23.1 ; C23.1@1538.46,522.71 K5.2@1593.02,522.71
NetC26_1: C26.1 U6.2 | length 76.7
  Top Layer w7.87: v2@1264.7,431.63 1266.1,433.03 U6.2
  Bottom Layer w7.87: v2(1263.66,432.67) C26.1@1292.84,432.67
NetC32_1: C32.1 R25.2 R28.1 U4.5 | length 313.4
  Top Layer w12: v1(852.7,315.39) 852.7,367.75 892.45,407.5 v1(975.71,407.5)
  Bottom Layer w12: R28.1@824.37,246.67 R25.2 v1(852.7,315.39) ; U4.5 v1(975.71,407.5)
NetC36_1: C36.1 R1.2 R3.2 R4.1 | length 108.1
  Top Layer w7.87: R4.1 R3.2@1545.45,1003.06 ; R3.2@1547.7,1000.81 R1.2@1617.02,1000.81
NetC37_1: C37.1 U1.18 | length 72.3
  Top Layer w7.87: U1.18 1500.5,878.25 C37.1 ; C37.1@1509.62,888.06 C37.1@1509.89,888.33
NetC37_2: C37.2 K7.1 R4.2 | length 87.2
  Top Layer w7.87: C37.2 R4.2@1545.4,924.82 ; C37.2@1552.64,895.64 K7.1
NetC38_1: C38.1 U1.17 | length 71.4
  Top Layer w7.87: U1.17 1499.52,862.5 C38.1 ; C38.1@1508.22,852.76 C38.1@1508.78,852.2
NetC38_2: C38.2 K7.2 R5.1 | length 88.6
  Top Layer w7.87: R5.1@1544.18,816.28 C38.2 ; C38.2@1551.06,845.36 K7.2
NetC48_1: C48.1 K5.1 R31.2 | length 99.7
  Top Layer w20: R31.2 C48.1 ; C48.1@1538.41,572.99 K5.1
NetC49_1: C49.1 R11.2 | length 38.9
  Top Layer w7.87: R11.2@1393.44,597.52 C49.1
NetL3_1: L3.1 U4.3
NetL_2: L.2 R15.2 | length 94.9
  Top Layer w20: L.2@265.08,996.83 265.08,1047.29 v1(265.21,1047.42)
  Bottom Layer w20: R15.2 265.21,1085.07 v1(265.21,1047.42)
NetLED1_1: LED1.1 R13.1 | length 28.3
  Top Layer w7.87: R13.1@246.62,75.11 LED1.1
  Top Layer w10: LED1.1@272.93,76.45 LED1.1@274.9,76.45
NetLED1_4: LED1.4 R30.1 | length 68.8
  Top Layer w7.87: LED1.4 v1@294.59,158.04
  Bottom Layer w7.87: R30.1 v1(294.82,158.27)
NetQ1_1: Q1.1 R50.2 | length 45.1
  Bottom Layer w10: R50.2@175.15,965.92 Q1.1
NetQ1_3: Q1.3 R15.1 | length 81.3
  Bottom Layer w20: Q1.3@139.88,1089.73 R15.1
NetR2_1: R2.1 R9.1 U1.20 | length 136.3
  Top Layer w7.87: U1.20 1460.48,909.75 1464.45,913.72 v1(1464.46,970.43) ; v1@1464.22,970.67 R9.1
  Bottom Layer w7.87: v1(1464.46,970.43) R2.1@1464.46,998.1
NetR11_1: R11.1 U6.4 | length 251.9
  Top Layer w7.87: U6.4@1299.2,382.18 1363.43,382.18 1384.37,403.12 1384.37,546.61 R11.1@1394.67,556.92
NetR12_1: R12.1 U6.3 | length 217.2
  Top Layer w7.87: U6.3@1299.2,407.77 1358.87,407.77 1368.62,417.52 1368.62,546.46 R12.1@1358.17,556.92
NetR13_2: R13.2 U2.1 | length 40
  Top Layer w7.87: U2.1 R13.2@212.02,70.34
NetR16_2: R16.2 U2.5 | length 47.8
  Top Layer w12: U2.5 R16.2@370.09,30.31
NetR22_1: R22.1 U6.8 | length 98.1
  Top Layer w15: R22.1 1450.14,510.97 1450.14,463.44 1454.96,458.62 U6.8
NetR24_2: R24.2 R27.1 U4.1 | length 94.7
  Bottom Layer w12: R27.1@889.1,324.24 U4.1 ; R24.2@889.66,288.13 R27.1
NetR31_1: R31.1 U6.5 | length 252.8
  Top Layer w15: R31.1 1425.45,534.92 1425.45,397.55 1441.16,381.84 U6.5
  Top Layer w20: R31.1@1463.04,572.77 R31.1
PA_CTRL: R14.1 U3.25 U6.1 | length 648.8
  Top Layer w7.87: U3.25 996.27,164.36 1004.21,156.42 1172.53,156.42 1203.54,187.43 1203.54,430.52 1231.64,458.62 v2(1263.58,458.62) U6.1
  Bottom Layer w7.87: v2(1263.58,458.62) R14.1@1286.24,458.62
PA_GND: C20.1 C21.1 C22.1 C23.2 C26.2 C40.1 C41.1 C48.2 R8.1 R14.2 U6.7 | length 781.3
  Top Layer w15: U6.7 C22.1@1533.99,433.03
  Top Layer w20: C48.2 1538.41,649.1 1557.11,667.8 R8.1 ; C22.1@1538.46,437.86 C23.2 ; C22.1@1539.47,438.51 C21.1 v1@1609.21,468.96
  Bottom Layer w20: C26.2 1331.32,430.12 R14.2 1336.1,469.1 v1(1609.07,469.1) ; 1538.59,471.59 v1(1538.59,628.36) 1538.59,617.76
  other v1: 1573.28,473.58 1661.78,486.21 1260.12,499.78 1319.97,499.91 1259.99,540 1320.64,539.59 1662.33,552.05 1319.51,579.26 1259.99,579.83 1663.69,602.11 1294.57,620.08 1456.63,620.29 1502.36,624.69 1580.44,625.78
TOUCH1: C42.1 K2.2 R10.2 U3.4 | length 389.2
  Top Layer w7.87: K2.2 111.54,734.89 v1(174,734.89) ; v1(378.65,750.48) 387.57,759.4 U3.4
  Bottom Layer w7.87: C42.1@104.39,734.89 v1(174,734.89) 340.47,734.89 356.06,750.48 v1(378.65,750.48)
TOUCH2: C44.1 K1.1 R19.2 U3.5 | length 727.3
  Top Layer w7.87: K1.1 v1@173.26,360.74 ; v1(378.5,722.6) 379.14,722.6 392.34,709.4 U3.5
  Bottom Layer w7.87: C44.1@104.09,360.74 v1@174,360.74 ; v1@174,360 v1@174,360.74 ; v1(174.26,360.74) v1@174,360.74 ; v1(378.5,722.6) 362.04,722.6 347.26,707.82 193.82,707.82 174,688 v1@174,360.74
USB_ADC: C46.1 R35.1 R48.2 U3.7 | length 626.4
  Top Layer w7.87: v1@240.68,204 243.03,206.35 243.03,226.67 299.45,283.09 299.45,587.03 321.82,609.4 U3.7 ; R35.1@242.89,173.87 R35.1 v1@242.89,201.79
  Top Layer w10: R48.2@211.16,173.87 242.89,173.87 R35.1@244.01,173.87
  Bottom Layer w7.87: C46.1 v1(242.42,202.26)
USB_DM: K9-1.A7 K9-1.B7 R21.2 | length 404.9
  Top Layer w6: v2(567.64,40.22) 581.58,26.28 K9-1.A7
  Top Layer w7.87: K9-1.B7 v1@601.27,104.89
  Bottom Layer w6: v2(567.64,40.22) 605.58,78.16 v1(605.58,107.84)
  Bottom Layer w7.87: R21.2 573.36,302.52 605.58,270.3 v1(605.58,107.84)
USB_DP: K9-1.A6 K9-1.B6 R20.2 | length 300
  Top Layer w6: K9-1.B6 581.58,54.55 590.86,45.28 ; 590.86,45.28 601.27,34.87 K9-1.A6
  Top Layer w7.87: K9-1.B6 v1@581.58,103.86
  Top Layer w10: K9-1.B6@581.36,73.11 K9-1.B6
  Bottom Layer w7.87: R20.2 560.17,266.17 577.6,248.74 v1(577.6,107.84)
VBAT: C13.2 C24.2 C25.2 C39.2 K6.1 K8.3 R47.2 U2.3 | length 2450.1
  Top Layer w7.87: R47.2 325.32,107.96 333.24,100.04 386.32,100.04 405.92,80.44 405.92,-12.32 v1(437.43,-43.83) v1@441.78,-48.18
  Top Layer w15: v1@212.02,-67.53 U2.3
  Top Layer w20: C24.2@131.19,-44.49 U2.3
  Top Layer w25: C39.2 C13.2 1523.4,245.72 1531,253.32 K6.1
  Top Layer w40: K6.1 v3@1653.01,253.32
  Bottom Layer w18: v1(211.91,-67.64) 215.68,-71.41 410.55,-71.41 478.6,-3.36 718.52,-3.36 771.36,-56.2 1072.19,-56.2 1103.2,-25.19 K8.3
  Bottom Layer w40: K8.3 1103.2,111.91 1129.33,138.04 1700.49,138.04 1734.98,172.53 1734.98,236.45 1718.16,253.27 v3(1653.06,253.27)
VCC: C20.2 C21.2 C22.2 C30.2 C31.2 K8.1 K8.2 L.1 R24.1 R30.2 U4.4 U6.6 | length 3522.9
  Top Layer w7.87: v1@555.08,158.12 716.97,158.12 744.42,130.67 921.57,130.67 945.71,106.53 K8.1
  Top Layer w15: U6.6 C22.2@1533.45,407.43
  Top Layer w20: L.1@214.8,996.83 v1(214.8,1047.09) ; C22.2 1539.47,403.07 C21.2 v1(1609.21,371.57)
  Top Layer w25: v1(527.08,866.42) 938.58,866.42 1007.41,797.59 v1(1007.41,457.83)
  Bottom Layer w7.87: R30.2 294.9,75.03 318.73,98.86 416.59,98.86 475.85,158.12 552.97,158.12 v1(555.08,156.01)
  Bottom Layer w12: R24.1 929.27,261.49 935.97,254.79 1024.46,254.79
  Bottom Layer w20: 1025.18,371.57 v1(1609.21,371.57)
  Bottom Layer w25: v1(214.8,1047.09) 214.8,938.05 285.69,867.16 526.34,867.16 v1(527.08,866.42) ; U4.4 v1(1007.41,457.83) 1024.46,440.78 1024.46,254.79 K8.2
  Bottom Layer w40: K8.1 K8.2
VCC_3V3: C32.2 C33.2 C34.2 C35.2 L3.2 R6.2 R10.1 R17.1 R19.1 R25.1 R26.1 R29.1 | length 3214.4
  Top Layer w10: v1(-7,445) v1(60,445)
  Top Layer w12: v1@-7.98,777.52 v1@-5.92,777.52 ; v1@-5.92,775.46 v1(207,775.46)
  Top Layer w25: v1(207,775.46) R17.1
  Bottom Layer w10: v1(60,445) 128,445 142,431 R19.1
  Bottom Layer w12: R29.1 20.15,860.81 -7.39,833.26 -7.39,271.58 21.04,243.15 R26.1 ; R10.1 v1@206.22,774.68 ; L3.2 784.81,282.29 C32.2@785,282.11
  Bottom Layer w25: v1(207,775.46) 237.04,805.5 518.65,805.5 ; C33.2 561.95,369.63 526.92,404.66 526.92,807.88 584.07,865.03 1075.62,865.03 1247.57,1036.98 R6.2 ; C33.2@617.13,369.61 C35.2 L3.2@779.74,369.61
  other v1: -7.94,775.31
VUSB: C45.1 K9-1.A4 K9-1.A9 K9-1.B4 K9-1.B9 LED1.3 R35.2 U2.4 | length 912
  Top Layer w7.87: v1(243.27,106.26) 243.27,131.28 265.97,131.28 LED1.3 LED1.3@272.81,124.2 ; v1(267.42,-43.6) 268.31,-44.49 U2.4
  Top Layer w11.5: 542.21,-43.55 K9-1.A9 K9-1.B4
  Top Layer w12: 542.21,-43.55 556.67,-58.01 626.99,-58.01 640.73,-44.27 K9-1.B9
  Top Layer w20: U2.4 C45.1@369.03,-44.49 ; C45.1 v1@396.7,-43.78
  Bottom Layer w7.87: v1(243.27,106.26) 243.27,-19.45 v1(267.42,-43.6)
  Bottom Layer w18: v1(396.8,-43.68) 396.8,43.26 426.42,72.88 v1(519.48,72.88)
pads on no net: K3.3 K4.3 K9-1.A5 K9-1.A8 K9-1.B5 K9-1.B8 K9-1.NC K9.3 U3.19 U3.20 U3.21 U3.22 U3.23 U3.24 U3.28 U3.29 U3.30 U3.31 U3.32 U3.33 U3.34 U3.35 U3.39

## Polygon pours and split planes (outlines as drawn)
AU_GND on Bottom Layer "Top Layer-No Net" (solid, remove dead copper, pour order 1000): 1240.15,1099.54 1280.65,1140.04 1659.47,1140.04 1699.94,1099.57 1699.94,698.7 1661.27,660.03 1280.35,660.03 1240.15,700.23
PA_GND on Bottom Layer "Top Layer-No Net" (solid, remove dead copper, pour order 1001): 1239.84,599.87 1279.37,639.73 1659.96,640 1699.97,600.01 1700.09,439.68 1660.28,399.87 1619.15,399.83 1279.99,399.99 1239.81,439.97
GND on Bottom Layer "Top Layer-No Net" (solid, remove dead copper, pour order 1000): -113.16,-91.21 -113.16,1205.73 231.18,1205.73 1851.34,1205.73 1851.34,1127.89 1851.34,-93.41 1745.26,-93.41 -113.16,-93.41 -113.16,-91.21
AU_GND on Top Layer "Top Layer-No Net" (solid, remove dead copper, pour order 1002): 1240.15,1099.54 1280.65,1140.04 1659.47,1140.04 1699.94,1099.57 1699.94,698.7 1661.27,660.03 1280.35,660.03 1240.15,700.23
PA_GND on Top Layer "Top Layer-No Net" (solid, remove dead copper, pour order 1003): 1239.84,599.87 1279.37,639.73 1659.96,640 1699.97,600.01 1700.09,439.68 1660.28,399.87 1619.15,399.83 1279.99,399.99 1239.81,439.97
GND on Top Layer "Top Layer-No Net" (solid, remove dead copper, pour order 1001): -112.78,-91.11 -112.78,1205.83 231.56,1205.83 1851.72,1205.83 1851.72,1127.99 1851.72,-93.31 1745.64,-93.31 -112.78,-93.31 -112.78,-91.11

## Keep-outs
Keep-Out Layer:
  circle w5: c1732.45,-0.47 r39.37
  circle w5: c0.17,-0.1 r39.37
  circle w5: c1734.43,1104.23 r40
  circle w5: c1.73,1105.98 r39.37
  lines w5: 412.65,1203.63 412.65,993.77 1134.03,993.77 1134.03,1201.59 1134.03,1203.63 1799.88,1203.63 1851.82,1151.68 1851.82,461.4 1793.9,461.4 1793.9,124.74 1851.81,124.74 1851.81,-47.75 1804.05,-95.51 1582.9,-95.51 1582.9,-37.9 1233.04,-37.9 1233.04,-93.28 1231.37,-93.28 -67.69,-93.28 -112.73,-48.24 -112.73,1143.03 -112.73,1153.01 -62.11,1203.63 413.4,1203.63

## Other copper
Top Layer:
  rectangle net VUSB: 509.02,56.2 539.34,89.82
  rectangle net AU_GND: 1219.61,958.38 1251.17,1008.61
  rectangle net AU_GND: 1220.4,737.01 1263.56,773.73
Bottom Layer:
  rectangle net GND: 870.6,408.34 946.45,432.26
  rectangle net GND: 917.14,311.66 946.46,415.29
  rectangle net GND: 978.09,276.43 1001.49,335.06
  rectangle net GND: 917.14,311.66 1001.49,355.37
  rectangle net GND: 711.73,408.27 875.26,431.84
  rectangle net GND: 711.93,391.03 857.51,449
  rectangle net GND: 604.63,391.18 716.15,417.12
  rectangle net NetL3_1: 851.53,457.37 909.17,500.72

## Silkscreen, mask and mechanical layers (free items; w line width, h text height)
Top Overlay:
  circle w10: c1732.54,1102.24 r78.74
  circle w10: c-0.9,1102.29 r78.74
  circle w10: c-1.7,-0.38 r78.74
  circle w10: c1730.59,-2.97 r78.74
  lines w5: 1405.26,868 1405.26,870.49 1563.75,870.49
  text "+MIC-" at 1810.94,830.97 h20 r90
  text "SPK-" at 1808.57,556.23 h20 r90
  text "SPK+" at 1807.48,473.53 h20 r90
  text "B+" at 1552.29,283.45 h20
  text "B-" at 1552.29,158.8 h20
Mechanical 1:
  circle w4.92: c1734.16,1104.06 r40
  circle w4.92: c1732.29,-0.83 r40
  circle w4.92: c1.71,1105.65 r40
  circle w4.92: c0.02,0.01 r40
  lines w5: -112.86,-48.13 -112.78,1153.04 -62.1,1203.65 412.67,1203.72 412.67,993.74 1133.98,993.74 1133.95,1203.58 1799.84,1203.65 1851.81,1151.55 1851.81,461.45 1851.74,461.45 1793.87,461.38 1793.94,124.69 1851.81,124.69 1851.88,-47.85 1803.9,-95.82 1582.96,-95.82 1582.96,-37.88 1233.1,-37.95 1233.1,-93.26 -67.83,-93.26 -112.86,-48.13